# Altium PCB plp_com_h4.PcbDoc
Units mm, origin at the board's own origin, x right, y up, seen from the top; angles counter-clockwise.
Board outline 44.5 x 44.5 mm, 2 copper layers (Top Layer, Bottom Layer), stack 1.486 mm thick; 1 components, 0 nets, 5 pads, 0 vias.
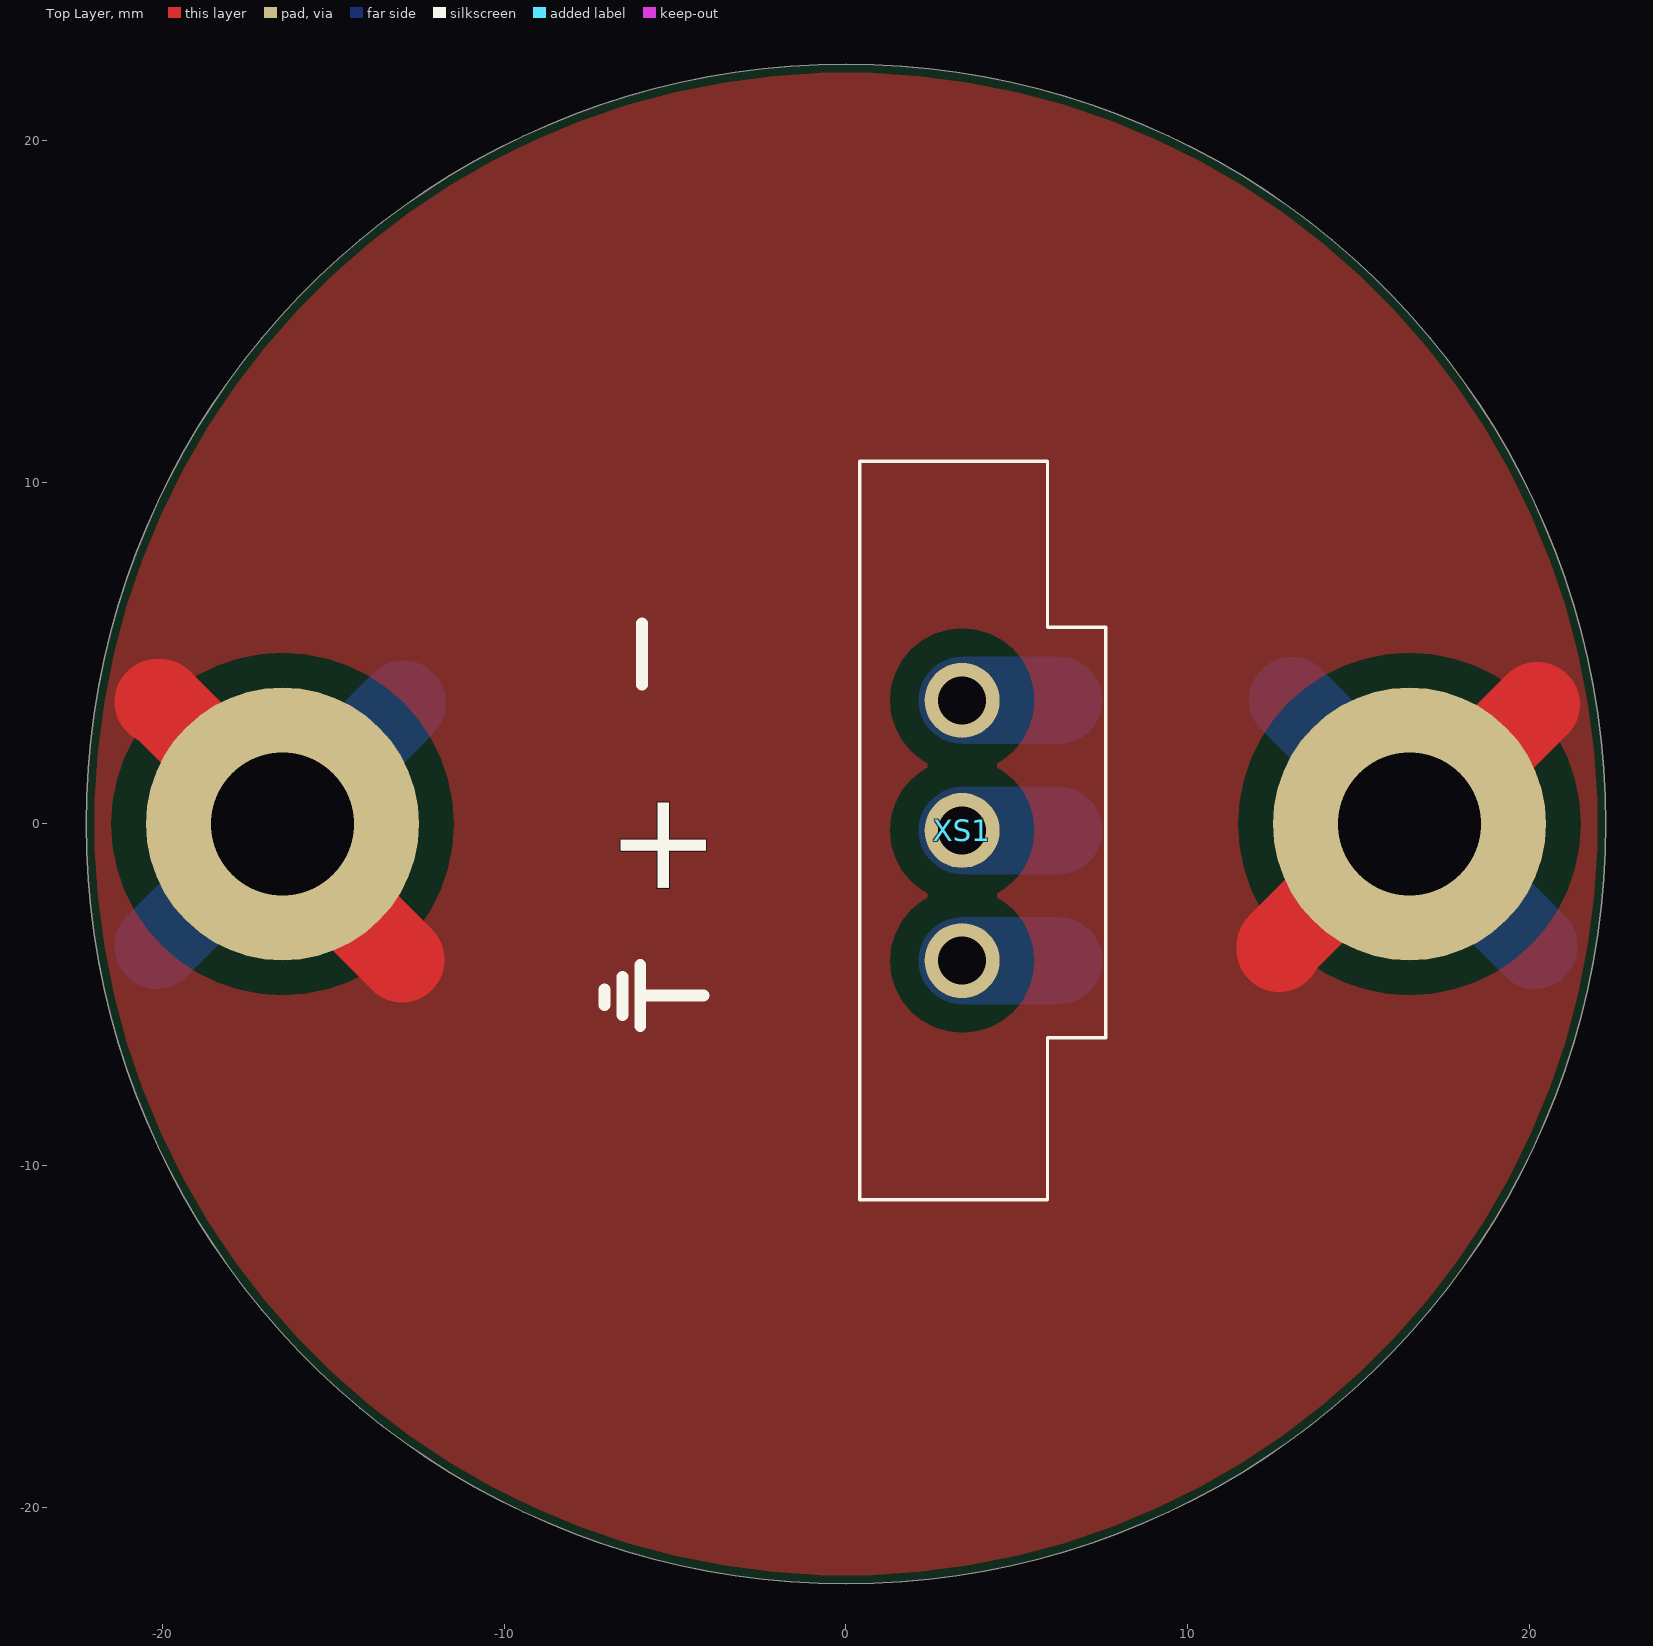
[diagram p0: Top Layer view]
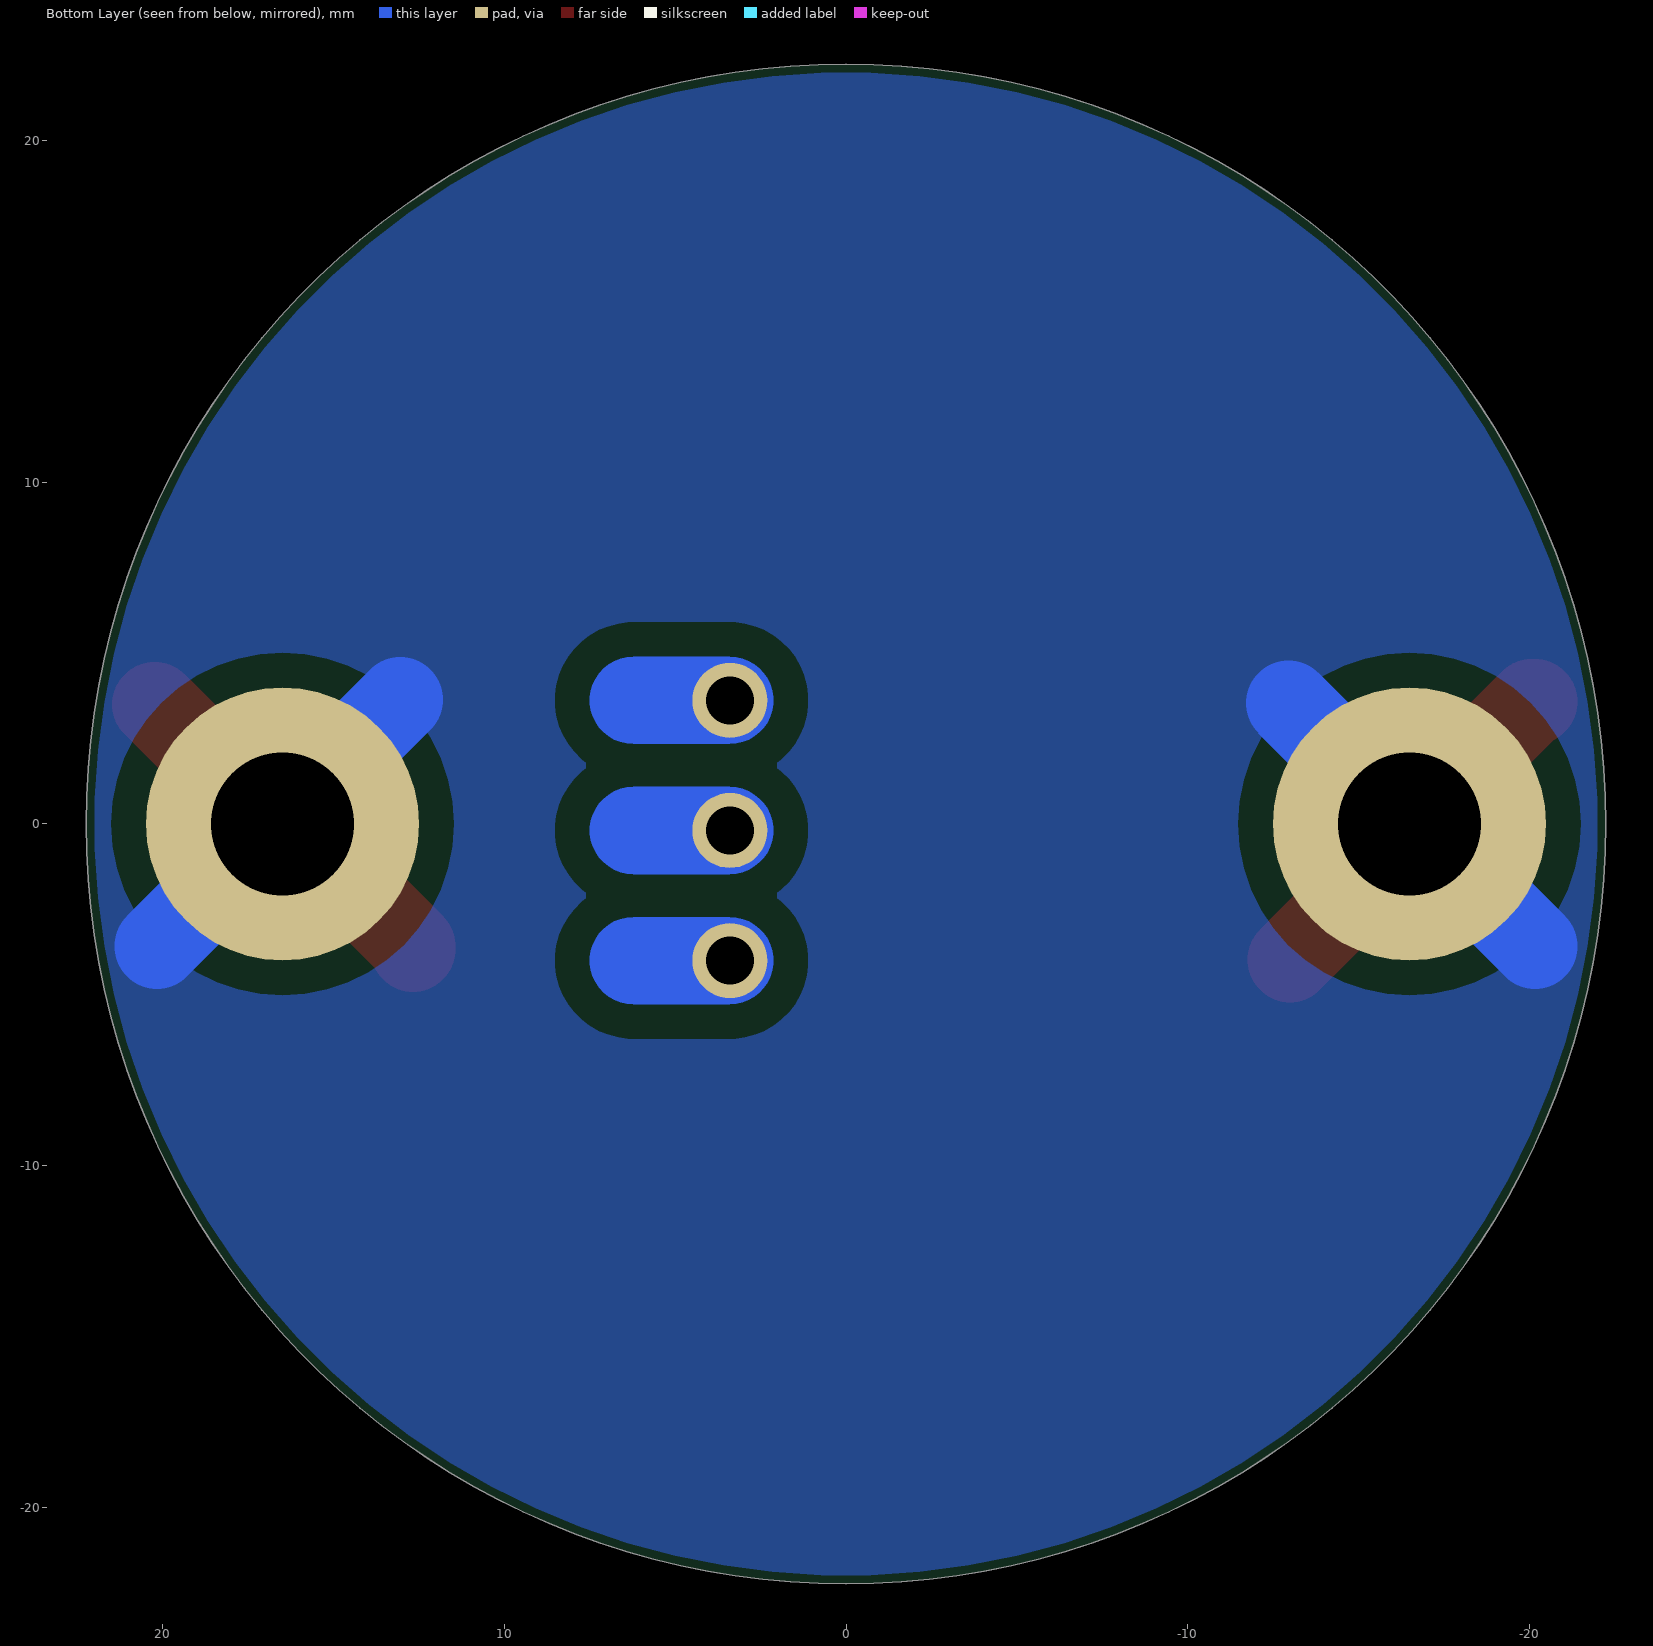
[diagram p1: Bottom Layer view, seen from below]

## Layer stack, top to bottom
Top Solder: solder mask 0.0102, Solder Resist, Dk 3.5
Top Layer: signal copper 0.018
Dielectric 2: prepreg 0.125, PP-006, Dk 4.1
Dielectric 1: dielectric 1.2, FR-4, Dk 4.8
Dielectric 3: prepreg 0.125, PP-006, Dk 4.1
Bottom Layer: signal copper 0.018
Bottom Solder: solder mask 0.0102, Solder Resist, Dk 3.5

## Board outline
-22.25,0 ccw(c0,0) 0,-22.25 ccw(c0,0) 22.25,0 ccw(c0,0) 0,22.25 ccw(c0,0)

## Design rules (kind name [scope] priority, off if disabled: settings)
BoardOutlineClearance [All] p1: gap=0.254 ignorepadtopadclearanceinfootprint=FALSE
Clearance [All] p1: gap=0.2 ignorepadtopadclearanceinfootprint=FALSE except(0: Arc-Hole Track-Hole SMDPad-Hole THPad-Hole Via-Hole Fill-Hole Poly-Hole Region-Hole Text-Hole; 1: THPad-Fill THPad-Poly THPad-Region Fill-Fill Fill-Poly Fill-Region Poly-Poly Poly-Region Region-Region)
HoleSize [All] p1: absolutevalues=TRUE maxlimit=5 minlimit=0.025 maxpercent=80.000 minpercent=20.000
PlaneClearance [All] p1: clearance=1
PolygonConnect PolygonConnect_1 [All] p1: connectstyle=Relief reliefconductorwidth=0.254 reliefentries=4 polygonreliefangle="90 Angle" airgapwidth=0.254
RoutingVias [All] p1: holewidth=0.3 width=0.7 viastyle="Through Hole" minholewidth=0.3 minwidth=0.7 maxholewidth=0.711 maxwidth=1.27
ShortCircuit [All] p1: allowed=TRUE
SilkToSilkClearance [All] p1: silktosilkclearance=0.15
SolderMaskExpansion [All] p1: expansion=0.102 istentingtop=FALSE
Width [All] p1: maxlimit=5 minlimit=0.254 preferedwidth=0.254
26 further rules are at their usual default settings.

## Components (designator, comment, footprint, x,y, rotation, side; value= is the part's Value field where it differs from the comment)
XS1 "15EDGVM-3.81-03P" "CON: 15EDGVM-3.81-03P" 3.4,-4 r90 top

## Footprints (in the part's own frame and the unit in brackets; to place one, negate y for a bottom-side part, rotate by r counter-clockwise, add the part's x,y. Pads: shape width x height; smd on the part's side, far side on the other; paste and mask are expansions set on the pad)
"CON: 15EDGVM-3.81-03P" [mm]
  round 2.2 hole 1.4: 1(0,0) 2(3.81,0) 3(7.62,0)
  Bottom Layer region: -1.275,-2.83 -1.149,-3.383 -0.795,-3.827 -0.284,-4.073 0.284,-4.073 0.795,-3.827 1.149,-3.383 1.275,-2.83 1.275,-2.83 1.275,0 1.149,0.553 0.795,0.997 0.284,1.243 -0.284,1.243 -0.795,0.997 -1.149,0.553 -1.275,0 -1.275,0
  Bottom Layer region: 2.535,-2.83 2.661,-3.383 3.015,-3.827 3.526,-4.073 4.094,-4.073 4.605,-3.827 4.959,-3.383 5.085,-2.83 5.085,-2.83 5.085,0 4.959,0.553 4.605,0.997 4.094,1.243 3.526,1.243 3.015,0.997 2.661,0.553 2.535,0 2.535,0
  Bottom Layer region: 6.345,-2.83 6.471,-3.383 6.825,-3.827 7.336,-4.073 7.904,-4.073 8.415,-3.827 8.769,-3.383 8.895,-2.83 8.895,-2.83 8.895,0 8.769,0.553 8.415,0.997 7.904,1.243 7.336,1.243 6.825,0.997 6.471,0.553 6.345,0 6.345,0
  silkscreen extent -7,-4.2 14.62,3, body extent -7.16,-4.2 14.66,3.05, height 9.2

## Free pads (board coordinates)
  round 8 hole 4.2: 0(-16.5,0) 0(16.5,0)

## Nets (pads, with @x,y where several pads share a name; then routed paths per layer and width w, separated by ;. In a path a pad name is that pad's centre, name@x,y a point inside that pad or via, vN(x,y) a via of type N, cw(c..) or ccw(c..) an arc to the next point about the centre after c; other vN are vias at no path point)
pads on no net: XS1.1 XS1.2 XS1.3
copper on no net: | length 41.4
  Top Layer w2.5: -20.176,3.584 -20.084,3.584 -16.5,0 -16.5,-0.475 -13,-3.975 ; 12.678,-3.676 12.678,-3.584 16.262,0 16.738,0 20.238,3.5
  Bottom Layer w2.5: -20.176,-3.584 -16.592,0 -16.5,0 -12.957,3.543 ; 13.049,3.635 16.592,0.092 ; 16.592,0 20.176,-3.584

## Polygon pours and split planes (outlines as drawn)
no net on Bottom Layer "NONET_L02_P-001" (solid, pour order 0): -23,23 23,23 23,-24 -23,-24
no net on Top Layer "NONET_L02_P-001" (solid, pour order 1): -23.177,23 22.823,23 22.823,-23.458 -23.177,-23.458

## Silkscreen, mask and mechanical layers (free items; w line width, h text height)
Top Overlay:
  lines w0.35: -7.075,-5.297 -7.075,-4.847 ; -6.55,-5.597 -6.55,-4.472 ; -6.025,-5.922 -6.025,-4.122 ; -5.975,-5.022 -4.175,-5.022 ; -5.975,4.078 -5.975,5.878
  text "+" at -7.55,1.053 h5 r270
Bottom Solder:
  circle w1: c0,0 r21.75
  lines w0.35: -3.1,-5.297 -3.1,-4.847 ; -2.575,-5.597 -2.575,-4.472 ; -2.05,-5.922 -2.05,-4.122 ; -2,-5.022 -0.2,-5.022 ; -2,4.078 -2,5.878
  text "+" at -3.575,1.053 h5 r270
Board:
  circle w0.15: c0,0 r22.25